# EAGLE board Hy2231 Version (EAGLE 9.4.2)
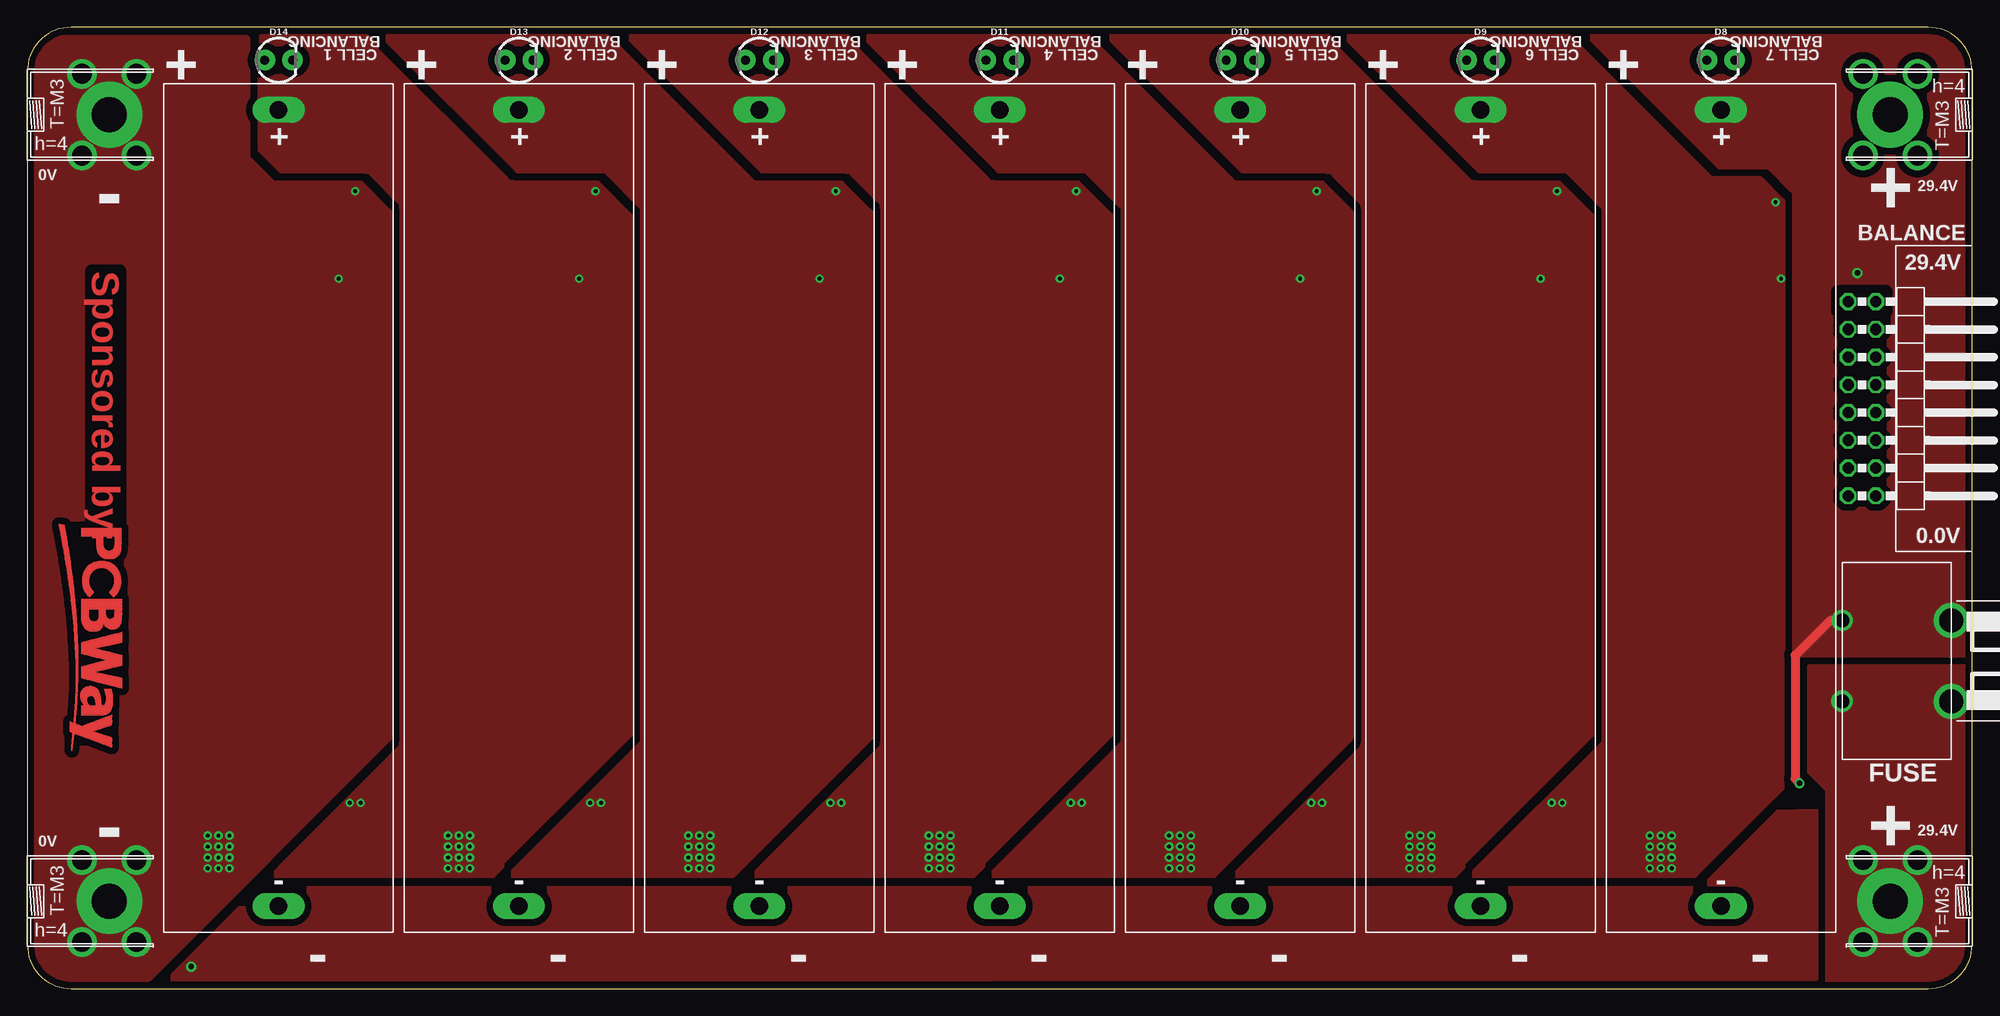
[diagram p0: board, top side]
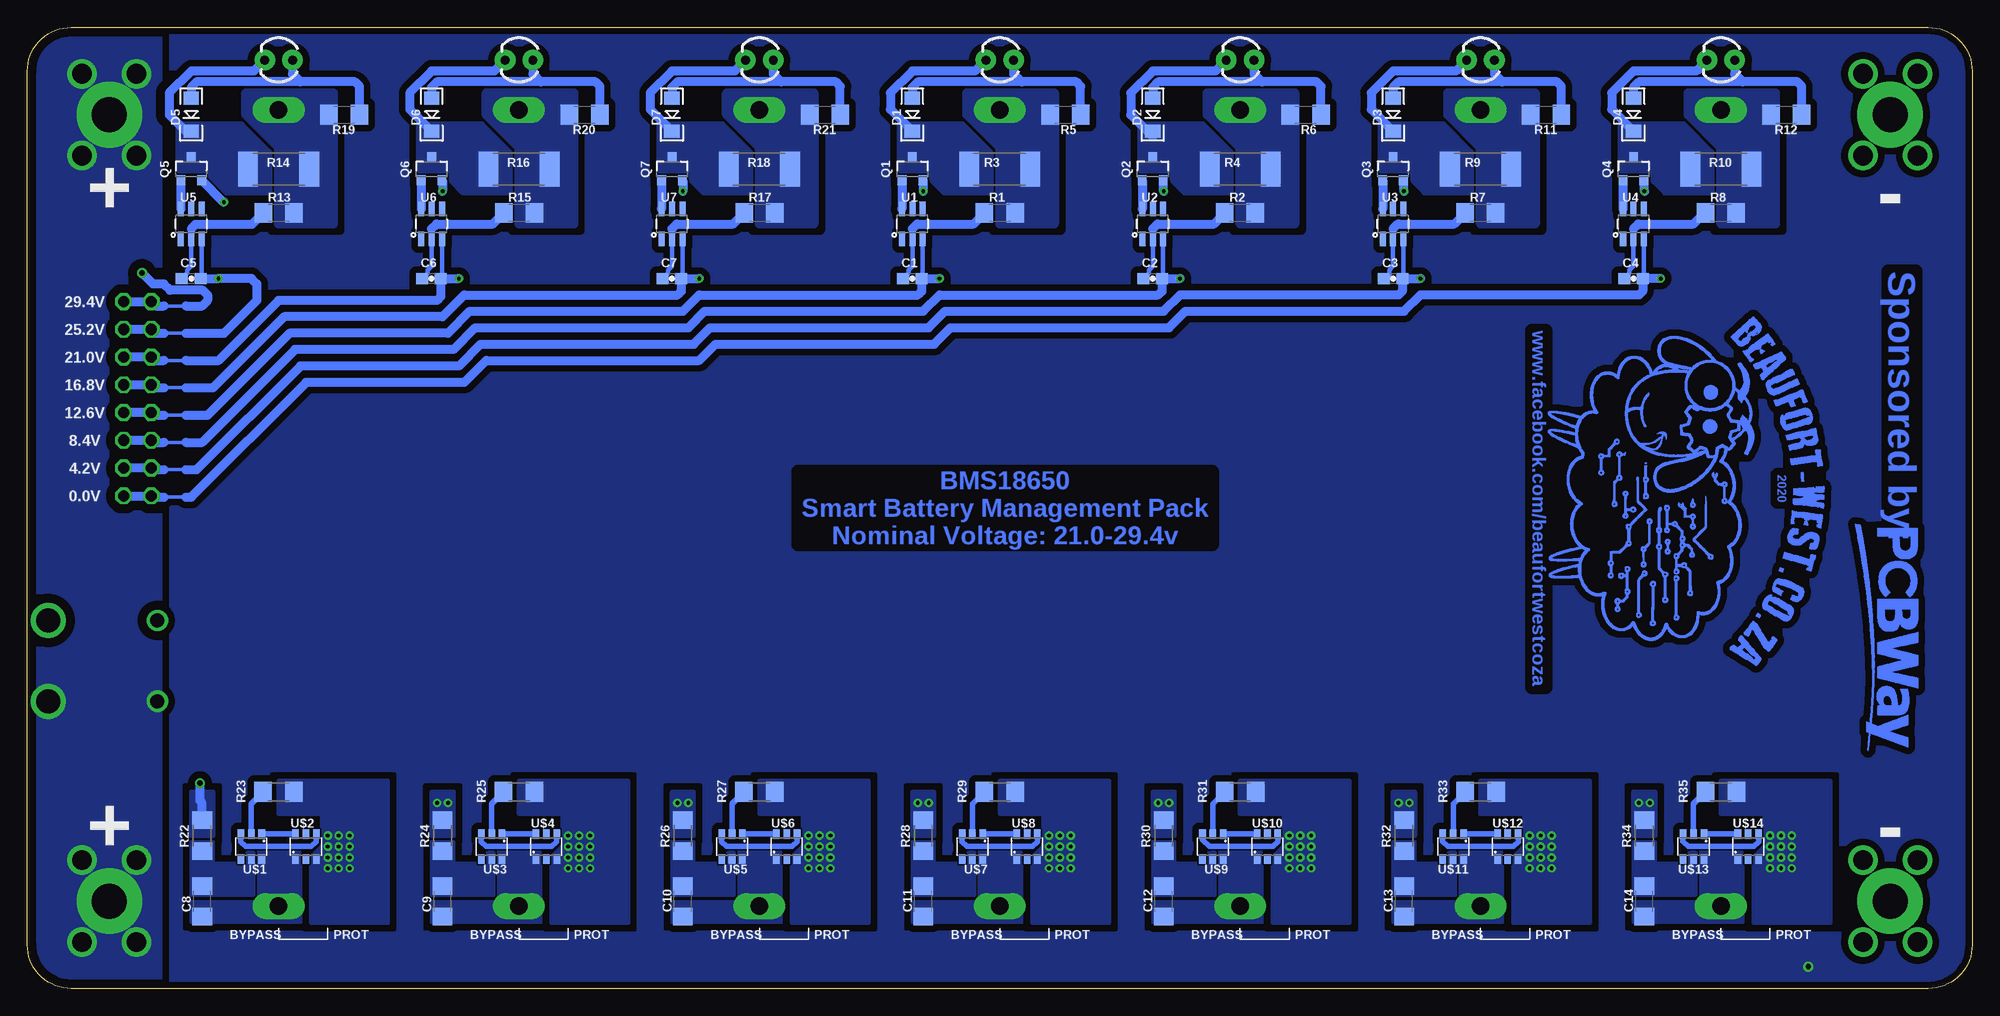
[diagram p1: board, bottom side, seen from below]

Size 178 x 88 mm. Coordinates in mm from the lower left corner, seen from the top.
Outline: 4,0 174,0 arc90 178,4 178,84 arc90 174,88 4,88 arc90 0,84 0,4 arc90 4,0
Copper layers (1*16): Top 0.035mm / dielectric 1.5mm / Bottom 0.035mm
Design rules "default *": minimum track width 6mil, minimum drill 0.35mm, track to track 6mil, track to pad 6mil, pad to pad 6mil, via to via 6mil, smd to smd 6mil, copper to edge 10mil, drill to drill 6mil, minimum pad ring 10mil, minimum via ring 8mil, stop-mask expansion 4mil, vias tented up to drill 0mil, thermal gap 10mil
Net classes: 0 default: width 0.203 mm, clearance 0.152 mm
tRestrict: area 165.7,62 to 170.1,63.8

## Footprints (pad centres in the part's own frame; a part is rotated, then mirrored left to right if it is on the bottom)
0603-CAP = smd 1.1 x 1: 1 -0.85,0; 2 0.85,0
C1206@1 = smd 1.6 x 1.8: 1 -1.4,0; 2 1.4,0
PCB2-M3 = drill 1.8: P$1 -3.75,-5; P$2 3.75,-5; P$3 3.75,-10; P$4 -3.75,-10
LED-1206 = smd 1.2 x 1.4: A -1.5,0; C 1.5,0
LED_3MM = drill 0.813 pad 1.88: A -1.27,0; K 1.27,0
2X08/90 = drill 1.016 octagon: 1 -8.89,-6.35; 2 -8.89,-3.81; 3 -6.35,-6.35; 4 -6.35,-3.81; 5 -3.81,-6.35; 6 -3.81,-3.81; 7 -1.27,-6.35; 8 -1.27,-3.81; 9 1.27,-6.35; 10 1.27,-3.81; 11 3.81,-6.35; 12 3.81,-3.81; 13 6.35,-6.35; 14 6.35,-3.81; 15 8.89,-6.35; 16 8.89,-3.81
SOT23-3 = smd 0.8 x 0.9: 1 -0.95,-1; 2 0.95,-1; 3 0,1.1
1206 = smd 1.6 x 1.8: 1 -1.4,0; 2 1.4,0
R2512 = smd 1.8 x 3.2: 1 -2.8,0; 2 2.8,0
R1206 = smd 1.6 x 1.803: 1 -1.422,0; 2 1.422,0
SOT23-6 = smd 0.55 x 1.35: 1 -0.95,-1.375; 2 0,-1.375; 3 0.95,-1.375; 4 0.95,1.375; 5 0,1.375; 6 -0.95,1.375
SOT23-6' = smd 0.6 x 0.9: 1 -0.95,-1.15; 2 0,-1.15; 3 0.95,-1.15; 4 0.95,1.15; 5 0,1.15; 6 -0.95,1.15
18650PTH-SINGLE = drill 1.6 long: NEG -36.45,0; POS 36.45,0
18MMFUSEHOLDER = drill 1.3: F1.0 -3.7,5; F2.0 3.7,5 | drill 2.2: F1.1 -3.7,-5; F2.1 3.7,-5

## Placement (x,y rotation side)
C1  104  [0603-CAP]  97,65 0 bottom
C2  104  [0603-CAP]  75,65 0 bottom
C3  104  [0603-CAP]  53,65 0 bottom
C4  104  [0603-CAP]  31,65 0 bottom
C5  104  [0603-CAP]  163,65 0 bottom
C6  104  [0603-CAP]  141,65 0 bottom
C7  104  [0603-CAP]  119,65 0 bottom
C8  0.1UF  [C1206@1]  162,8 90 bottom
C9  0.1UF  [C1206@1]  140,8 90 bottom
C10  0.1UF  [C1206@1]  118,8 90 bottom
C11  0.1UF  [C1206@1]  96,8 90 bottom
C12  0.1UF  [C1206@1]  74,8 90 bottom
C13  0.1UF  [C1206@1]  52,8 90 bottom
C14  0.1UF  [C1206@1]  30,8 90 bottom
CON1  PCB-2M3  [PCB2-M3]  0,80 90 top
CON2  PCB-2M3  [PCB2-M3]  178,80 270 top
CON7  PCB-2M3  [PCB2-M3]  0,8 90 top
CON8  PCB-2M3  [PCB2-M3]  178,8 270 top
D1  red  [LED-1206]  97,80 270 bottom
D2  red  [LED-1206]  75,80 270 bottom
D3  red  [LED-1206]  53,80 270 bottom
D4  red  [LED-1206]  31,80 270 bottom
D5  red  [LED-1206]  163,80 270 bottom
D6  red  [LED-1206]  141,80 270 bottom
D7  red  [LED-1206]  119,80 270 bottom
D8  [LED_3MM]  155,85 0 top
D9  [LED_3MM]  133,85 0 top
D10  [LED_3MM]  111,85 0 top
D11  [LED_3MM]  89,85 0 top
D12  [LED_3MM]  67,85 0 top
D13  [LED_3MM]  45,85 0 top
D14  [LED_3MM]  23,85 0 top
JP2  [2X08/90]  173,54 270 top
Q1  2302  [SOT23-3]  97,75 0 bottom
Q2  2302  [SOT23-3]  75,75 0 bottom
Q3  2302  [SOT23-3]  53,75 0 bottom
Q4  2302  [SOT23-3]  31,75 0 bottom
Q5  2302  [SOT23-3]  163,75 0 bottom
Q6  2302  [SOT23-3]  141,75 0 bottom
Q7  2302  [SOT23-3]  119,75 0 bottom
R1  100R  [1206]  89,71 180 bottom
R2  100R  [1206]  67,71 180 bottom
R3  100R  [R2512]  89,75 180 bottom
R4  100R  [R2512]  67,75 180 bottom
R5  10K  [1206]  83,80 0 bottom
R6  10K  [1206]  61,80 0 bottom
R7  100R  [1206]  45,71 180 bottom
R8  100R  [1206]  23,71 180 bottom
R9  100R  [R2512]  45,75 180 bottom
R10  100R  [R2512]  23,75 180 bottom
R11  10K  [1206]  39,80 0 bottom
R12  10K  [1206]  17,80 0 bottom
R13  100R  [1206]  155,71 180 bottom
R14  100R  [R2512]  155,75 180 bottom
R15  100R  [1206]  133,71 180 bottom
R16  100R  [R2512]  133,75 180 bottom
R17  100R  [1206]  111,71 180 bottom
R18  100R  [R2512]  111,75 180 bottom
R19  10K  [1206]  149,80 0 bottom
R20  10K  [1206]  127,80 0 bottom
R21  10K  [1206]  105,80 0 bottom
R22  100  [R1206]  162,14 90 bottom
R23  2K  [R1206]  155,18 180 bottom
R24  100  [R1206]  140,14 90 bottom
R25  2K  [R1206]  133,18 180 bottom
R26  100  [R1206]  118,14 90 bottom
R27  2K  [R1206]  111,18 180 bottom
R28  100  [R1206]  96,14 90 bottom
R29  2K  [R1206]  89,18 180 bottom
R30  100  [R1206]  74,14 90 bottom
R31  2K  [R1206]  67,18 180 bottom
R32  100  [R1206]  52,14 90 bottom
R33  2K  [R1206]  45,18 180 bottom
R34  100  [R1206]  30,14 90 bottom
R35  2K  [R1206]  23,18 180 bottom
U1  HY2213  [SOT23-6]  97,70 0 bottom
U2  HY2213  [SOT23-6]  75,70 0 bottom
U3  HY2213  [SOT23-6]  53,70 0 bottom
U4  HY2213  [SOT23-6]  31,70 0 bottom
U5  HY2213  [SOT23-6]  163,70 0 bottom
U6  HY2213  [SOT23-6]  141,70 0 bottom
U7  HY2213  [SOT23-6]  119,70 0 bottom
U$1  FS312F-G  [SOT23-6']  157.5,13 180 bottom
U$2  FS8205  [SOT23-6']  152.5,13 0 bottom
U$3  FS312F-G  [SOT23-6']  135.5,13 180 bottom
U$4  FS8205  [SOT23-6']  130.5,13 0 bottom
U$5  FS312F-G  [SOT23-6']  113.5,13 180 bottom
U$6  FS8205  [SOT23-6']  108.5,13 0 bottom
U$7  FS312F-G  [SOT23-6']  91.5,13 180 bottom
U$8  FS8205  [SOT23-6']  86.5,13 0 bottom
U$9  FS312F-G  [SOT23-6']  69.5,13 180 bottom
U$10  FS8205  [SOT23-6']  64.5,13 0 bottom
U$11  FS312F-G  [SOT23-6']  47.5,13 180 bottom
U$12  FS8205  [SOT23-6']  42.5,13 0 bottom
U$13  FS312F-G  [SOT23-6']  25.5,13 180 bottom
U$14  FS8205  [SOT23-6']  20.5,13 0 bottom
U$15  18650SINGLE  [18650PTH-SINGLE]  155,44 90 top
U$16  18650SINGLE  [18650PTH-SINGLE]  133,44 90 top
U$17  18650SINGLE  [18650PTH-SINGLE]  111,44 90 top
U$18  18650SINGLE  [18650PTH-SINGLE]  89,44 90 top
U$19  18650SINGLE  [18650PTH-SINGLE]  67,44 90 top
U$20  18650SINGLE  [18650PTH-SINGLE]  45,44 90 top
U$21  18650SINGLE  [18650PTH-SINGLE]  23,44 90 top
U$22  18MMFUSEHOLDER  [18MMFUSEHOLDER]  171.1,30 90 top

## Library data of the parts
C1-C7 D1-D7 R1-R21 = z_jlc_smt
C8-C14 R22-R35 = rcl
CON1 CON2 CON7 CON8 = Screw Terminals
D8-D14 = SparkFun-LED; PROD_ID: DIO-08794
JP2 = pinhead
Q1-Q7 = xmgu2008; PROD_ID: TRAN-12988
U1-U7 = xmgu2008
U$1-U$14 = buckboost
U$15-U$21 = 18650HOLDER
U$22 = Fuse Holder

## Nets
0V: C4.2 CON1.P$1 CON1.P$2 CON1.P$3 CON1.P$4 CON7.P$1 CON7.P$2 CON7.P$3 CON7.P$4 JP2.15 JP2.16 Q4.2 R35.1 U4.3 U$14.3
4.2V: C3.2 JP2.13 JP2.14 Q3.2 R8.1 R10.1 R12.1 R33.1 R34.2 U3.3 U$12.3 U$21.POS
8.4V: C2.2 JP2.11 JP2.12 Q2.2 R7.1 R9.1 R11.1 R31.1 R32.2 U2.3 U$10.3 U$20.POS
12.6V: C1.2 JP2.9 JP2.10 Q1.2 R2.1 R4.1 R6.1 R29.1 R30.2 U1.3 U$8.3 U$19.POS
16.8V: C7.2 JP2.7 JP2.8 Q7.2 R1.1 R3.1 R5.1 R27.1 R28.2 U7.3 U$6.3 U$18.POS
21.0V: C6.2 JP2.5 JP2.6 Q6.2 R17.1 R18.1 R21.1 R25.1 R26.2 U6.3 U$4.3 U$17.POS
25.2V: C5.2 JP2.3 JP2.4 Q5.2 R15.1 R16.1 R20.1 R23.1 R24.2 U5.3 U$2.3 U$16.POS
29.4V: JP2.1 JP2.2 R13.1 R14.1 R19.1 R22.2 U$15.POS U$22.F2.0 U$22.F2.1
N$1: C1.1 R1.2 U1.2
N$2: C5.1 R13.2 U5.2
N$3: Q1.1 U1.6
N$4: D1.C D11.K Q1.3 R3.2
N$5: Q5.1 U5.6
N$6: C2.1 R2.2 U2.2
N$7: Q2.1 U2.6
N$8: D2.C D12.K Q2.3 R4.2
N$9: C3.1 R7.2 U3.2
N$10: Q3.1 U3.6
N$11: D3.C D13.K Q3.3 R9.2
N$12: C4.1 R8.2 U4.2
N$13: Q4.1 U4.6
N$14: D4.C D14.K Q4.3 R10.2
N$15: D5.C D8.K Q5.3 R14.2
N$16: C6.1 R15.2 U6.2
N$17: Q6.1 U6.6
N$18: D6.C D9.K Q6.3 R16.2
N$19: C7.1 R17.2 U7.2
N$20: Q7.1 U7.6
N$21: D7.C D10.K Q7.3 R18.2
N$22: D5.A D8.A R19.2
N$23: D6.A D9.A R20.2
N$24: D7.A D10.A R21.2
N$25: D1.A D11.A R5.2
N$26: R23.2 U$1.2
N$27: D2.A D12.A R6.2
N$28: R25.2 U$3.2
N$29: D3.A D13.A R11.2
N$30: R27.2 U$5.2
N$31: D4.A D14.A R12.2
N$32: R29.2 U$7.2
N$33: R31.2 U$9.2
N$34: R33.2 U$11.2
N$35: R35.2 U$13.2
N$37: CON2.P$1 CON2.P$2 CON2.P$3 CON2.P$4 CON8.P$1 CON8.P$2 CON8.P$3 CON8.P$4 U$22.F1.0 U$22.F1.1
NEG1: C14.1 U$13.6 U$14.1 U$21.NEG
NEG2: C13.1 U$11.6 U$12.1 U$20.NEG
NEG3: C12.1 U$9.6 U$10.1 U$19.NEG
NEG4: C11.1 U$7.6 U$8.1 U$18.NEG
NEG5: C10.1 U$5.6 U$6.1 U$17.NEG
NEG6: C9.1 U$3.6 U$4.1 U$16.NEG
NEG7: C8.1 U$1.6 U$2.1 U$15.NEG
OC: U$1.3 U$2.4
OC1: U$3.3 U$4.4
OC2: U$5.3 U$6.4
OC3: U$7.3 U$8.4
OC4: U$9.3 U$10.4
OC5: U$11.3 U$12.4
OC6: U$13.3 U$14.4
OD: U$1.1 U$2.6
OD1: U$3.1 U$4.6
OD2: U$5.1 U$6.6
OD3: U$7.1 U$8.6
OD4: U$9.1 U$10.6
OD5: U$11.1 U$12.6
OD6: U$13.1 U$14.6
VCC-PROT: C8.2 R22.1 U$1.5
VCC-PROT1: C9.2 R24.1 U$3.5
VCC-PROT2: C10.2 R26.1 U$5.5
VCC-PROT3: C11.2 R28.1 U$7.5
VCC-PROT4: C12.2 R30.1 U$9.5
VCC-PROT5: C13.2 R32.1 U$11.5
VCC-PROT6: C14.2 R34.1 U$13.5

## Tracks (layer width: path | path; a pad name or v marks a point on that pad's centre or on a via)
0V  (via drill 0.35, 3.2 pad 6)
  Bottom 0.305: 165.5,45 163.5,45
  Bottom 0.406: U4.3 30.05,65.1
  Bottom 0.813: 30.05,65.1 C4.2 | Q4.2 30.05,73.05 v30,73 | JP2.16 JP2.15 166.54,45 165.5,45 | C4.2 30.15,63.85 30.5,63.5 50.5,63.5 52,62 72,62 73.5,60.5 93.5,60.5 95,59 115,59 116.5,57.5 136,57.5 138,55.5 152.5,55.5 163,45 163.5,45 | v28.5,65 C4.2
  other vias: 18.5,12 17.5,12 18.5,13 17.5,13 18.5,14 17.5,14 18.5,11 17.5,11 16.5,14 16.5,13 16.5,12 16.5,11 7.5,80 7.5,8
  pour Top (isolate 0.61, no thermals): 1,86.9 20,86.9 20,76 22.4,73.6 30.4,73.6 33,71 33,23 11,1 1,1
  pour Bottom (rank 2, no thermals): 19,13 20,12 20,6 13,6 13,19 23,19 23,16 19,16
4.2V  (via drill 0.35)
  Bottom 0.305: 165.5,47.5 163.5,47.5
  Bottom 0.406: U3.3 52.05,65.1
  Bottom 0.813: 52.05,65.1 C3.2 | Q3.2 52.05,73.05 v52,73 | JP2.14 JP2.13 166.5,47.5 165.5,47.5 | C3.2 52.15,63.85 52.5,63.5 72.5,63.5 74,62 94,62 95.5,60.5 115.5,60.5 117,59 136.5,59 138.5,57 153,57 162.5,47.5 163.5,47.5 | C3.2 v50.5,65
  other vias: 40.5,12 40.5,11 40.5,13 40.5,14 39.5,14 39.5,13 39.5,12 39.5,11 30.5,17 29.5,17 38.5,14 38.5,13 38.5,12 38.5,11
  pour Bottom (no thermals): 18,82 18,70 23,70 23,77 26,80 26,82
  pour Top (isolate 0.61, rank 2, no thermals): 21.5,87 31,87 44.4,73.6 52.4,73.6 55,71 55,23 42.5,10.5 22.5,10.5 34.5,22.5 34.5,71.5 31,75 23,75 21.5,76.5
  pour Bottom (rank 2, no thermals): 41,13 42,12 42,6 35,6 35,19 45,19 45,16 41,16
  pour Bottom (rank 2, no thermals): 29,14 31,14 31,18 29,18
8.4V  (via drill 0.35)
  Bottom 0.305: 165.5,50 163.5,50
  Bottom 0.406: U2.3 74.05,65.1
  Bottom 0.813: 74.05,65.1 C2.2 | Q2.2 74.05,73.05 v74,73 | JP2.12 JP2.11 166.46,50 165.5,50 | C2.2 74.15,63.85 74.5,63.5 94.5,63.5 96,62 116,62 117.5,60.5 137,60.5 139,58.5 153.5,58.5 162,50 163.5,50 | C2.2 v72.5,65
  other vias: 62.5,12 62.5,11 62.5,13 62.5,14 61.5,14 61.5,13 61.5,12 61.5,11 51.5,17 52.5,17 60.5,14 60.5,13 60.5,12 60.5,11
  pour Bottom (no thermals): 40,82 40,70 45,70 45,77 48,80 48,82
  pour Top (isolate 0.61, no thermals): 33,87 53,87 66.4,73.6 74.4,73.6 77,71 77,23 64.5,10.5 44.5,10.5 56.5,22.5 56.5,71.5 53,75 45,75
  pour Bottom (rank 2, no thermals): 63,13 64,12 64,6 57,6 57,19 67,19 67,16 63,16
  pour Bottom (rank 2, no thermals): 51,14 53,14 53,18 51,18
12.6V  (via drill 0.35)
  Bottom 0.305: 165.5,52.5 163.5,52.5
  Bottom 0.406: U1.3 96.05,65.1
  Bottom 0.813: 96.05,65.1 C1.2 | Q1.2 96,73.95 v96,73 | JP2.10 JP2.9 166.42,52.5 165.5,52.5 | C1.2 96.15,63.85 96.5,63.5 116.5,63.5 118,62 137.5,62 139.5,60 154,60 161.5,52.5 163.5,52.5 | C1.2 v94.5,65
  other vias: 84.5,12 84.5,13 84.5,14 84.5,11 83.5,11 83.5,12 83.5,13 83.5,14 74.5,17 73.5,17 82.5,14 82.5,12 82.5,11 82.5,13
  pour Top (isolate 0.61, rank 2, no thermals): 55,87 75,87 88.4,73.6 96.4,73.6 99,71 99,23 86.5,10.5 66.5,10.5 78.5,22.5 78.5,71.5 75,75 67,75
  pour Bottom (no thermals): 62,82 62,70 67,70 67,77 70,80 70,82
  pour Bottom (rank 2, no thermals): 85,13 86,12 86,6 79,6 79,19 89,19 89,16 85,16
  pour Bottom (rank 2, no thermals): 73,14 75,14 75,18 73,18
16.8V  (via drill 0.35)
  Bottom 0.305: 165.5,55 163.5,55
  Bottom 0.406: U7.3 118.05,65.1
  Bottom 0.813: 118.05,65.1 C7.2 | Q7.2 118,73.95 v118,73 | JP2.8 JP2.7 166.38,55 165.5,55 | C7.2 118.15,63.85 118.5,63.5 138,63.5 140,61.5 154.5,61.5 161,55 163.5,55 | C7.2 v116.5,65
  other vias: 106.5,12 106.5,11 106.5,13 106.5,14 105.5,14 105.5,13 105.5,12 105.5,11 96.5,17 95.5,17 104.5,14 104.5,13 104.5,12 104.5,11
  pour Top (isolate 0.61, no thermals): 77,87 97,87 110.4,73.6 118.4,73.6 121,71 121,23 108.5,10.5 88.5,10.5 100.5,22.5 100.5,71.5 97,75 89,75
  pour Bottom (no thermals): 84,82 84,70 89,70 89,77 92,80 92,82
  pour Bottom (rank 2, no thermals): 107,13 108,12 108,6 101,6 101,19 111,19 111,16 107,16
  pour Bottom (rank 2, no thermals): 95,14 97,14 97,18 95,18
21.0V  (via drill 0.35)
  Bottom 0.305: 165.5,57.5 163.5,57.5
  Bottom 0.406: U6.3 140.05,65.1
  Bottom 0.813: 140.05,65.1 C6.2 | Q6.2 140,73.95 v140,73 | JP2.6 JP2.5 166.34,57.5 165.5,57.5 | C6.2 140.15,63.35 140.5,63 155,63 160.5,57.5 163.5,57.5 | C6.2 v138.5,65
  other vias: 128.5,12 128.5,13 128.5,14 128.5,11 127.5,11 127.5,12 127.5,13 127.5,14 117.5,17 118.5,17 126.5,14 126.5,13 126.5,12 126.5,11
  pour Top (isolate 0.61, rank 2, no thermals): 99,87 119,87 132.4,73.6 140.4,73.6 143,71 143,23 130.5,10.5 110.5,10.5 122.5,22.5 122.5,71.5 119,75 111,75
  pour Bottom (no thermals): 106,82 106,70 111,70 111,77 114,80 114,82
  pour Bottom (rank 2, no thermals): 129,13 130,12 130,6 123,6 123,19 133,19 133,16 129,16
  pour Bottom (rank 2, no thermals): 117,14 119,14 119,18 117,18
25.2V  (via drill 0.35)
  Bottom 0.305: 165.5,60 163.5,60
  Bottom 0.406: U5.3 162.05,65.1
  Bottom 0.813: 162.05,65.1 C5.2 v160.5,65 157.5,65 157,64.5 157,63 160,60 163.5,60 | Q5.2 160.05,72 v160,72 | JP2.4 JP2.3 166.3,60 165.5,60
  other vias: 150.5,12 150.5,11 150.5,13 150.5,14 149.5,14 149.5,13 149.5,12 149.5,11 139.5,17 140.5,17 148.5,14 148.5,13 148.5,12 148.5,11
  pour Top (isolate 0.61, no thermals): 121,87 141,87 154,74 158.5,74 160.5,72 160.5,18.5 152.5,10.5 132.5,10.5 144.5,22.5 144.5,71.5 141,75 133,75
  pour Bottom (no thermals): 128,82 128,70 133,70 133,77 136,80 136,82
  pour Bottom (rank 2, no thermals): 151,13 152,12 152,6 145,6 145,19 155,19 155,16 151,16
  pour Bottom (rank 2, no thermals): 139,14 141,14 141,18 139,18
29.4V  (via drill 0.5)
  Top 0.813: U$22.F2.0 165,33.7 161.8,30.5 161.8,19.2 v162.2,18.8
  Bottom 0.305: 165.5,62.5 163.5,62.5
  Bottom 0.813: R22.2 162,17 162.2,17.2 v162.2,18.8 | JP2.2 JP2.1 166.26,62.5 165.5,62.5 | v167.5,65.5 166.5,64.5 165.5,64.5 164.94,63.94 161.94,63.94 161.5,63.5 161.5,63 162,62.5 163.5,62.5
  pour Bottom (no thermals): 150,82 150,70 155,70 155,77 158,80 158,82
  pour Bottom (rank 2, no thermals): 161,14 163,14 163,18 161,18
  pour Top (isolate 0.61, rank 2, no thermals): 143,87 177.5,87 177.5,30.7 161.9,30.7 161.9,64.5 161.8,64.5 161.8,72.4 159.2,75 155,75
COSMETICPLANE  (via drill 0.5)
  other vias: 15,2
  pour Top (isolate 0.61, rank 6): 13,1 21,9 153,9 160,16 163.6,16.1 163.6,1.1
  pour Bottom (isolate 0.61, rank 6): 178,88 3.5,88 0,84.5 0,3.5 3.5,0 178,0
N$1
  Bottom 0.406: C1.1 97.36,65.49 97.36,65.77 97,66.13 U1.2 97,69.56
  Bottom 0.813: 97,69.56 96.56,70 91.4,70 R1.2
N$2
  Bottom 0.406: C5.1 163.36,65.49 163.36,65.77 163,66.13 U5.2 163,69.56
  Bottom 0.813: 163,69.56 162.6,69.96 157.44,69.96 R13.2
N$3
  Bottom 0.813: Q1.1 U1.6
N$4
  Bottom 0.813: D11.K 91.27,84 97,84 99,82 99,80.5 D1.C
  pour Bottom (rank 2, no thermals): 90,76.5 90,73 94,73 95,74 95,75 98,75 98,79 92.5,79
N$5
  Bottom 0.813: Q5.1 U5.6
N$6
  Bottom 0.406: C2.1 75.36,65.49 75.36,65.77 75,66.13 U2.2 75,69.56
  Bottom 0.813: 75,69.56 74.56,70 69.4,70 R2.2
N$7
  Bottom 0.813: Q2.1 U2.6
N$8
  Bottom 0.813: D12.K 69.27,84 75,84 77,82 77,80 75,78
  pour Bottom (rank 2, no thermals): 68,76.5 68,73 72,73 73,74 73,75 76,75 76,79 70.5,79
N$9
  Bottom 0.406: C3.1 53.5,65 53.36,65.14 53.36,65.77 53,66.13 U3.2 53,69.56
  Bottom 0.813: 53,69.56 52.6,69.96 52.54,69.96 52.5,70 47.4,70 R7.2
N$10
  Bottom 0.813: Q3.1 U3.6
N$11
  Bottom 0.813: D13.K 47.27,84 53,84 55,82 55,80.5 D3.C
  pour Bottom (rank 2, no thermals): 46,76.5 46,73 50,73 51,74 51,75 54,75 54,79 48.5,79
N$12
  Bottom 0.406: C4.1 31.36,65.49 31.36,65.77 31,66.13 U4.2 31,69.56
  Bottom 0.813: 31,69.56 30.56,70 25.5,70 24.5,71 R8.2
N$13
  Bottom 0.813: Q4.1 U4.6
N$14
  Bottom 0.813: D14.K 25.27,84 31,84 33,82 33,80.5 D4.C
  pour Bottom (rank 2, no thermals): 24,76.5 24,73 28,73 29,74 29,75 32,75 32,79 26.5,79
N$15
  Bottom 0.813: D8.K 157.27,84 163,84 165,82 165,80 163.5,78.5 D5.C
  pour Bottom (rank 2, no thermals): 156,76.5 156,73 160,73 161,74 161,75 164,75 164,79 158.5,79
N$16
  Bottom 0.406: C6.1 141.36,65.49 141.36,65.77 141,66.13 U6.2 141,69.56
  Bottom 0.813: 141,69.56 140.56,70 135.4,70 R15.2
N$17
  Bottom 0.813: Q6.1 U6.6
N$18
  Bottom 0.813: D9.K 135.27,84 141,84 143,82 143,80.5 D6.C
  pour Bottom (rank 2, no thermals): 134,76.5 134,73 138,73 139,74 139,75 142,75 142,79 136.5,79
N$19
  Bottom 0.406: C7.1 119.36,65.49 119.36,65.77 119,66.13 U7.2 119,69.56
  Bottom 0.813: 119,69.56 118.56,70 113.4,70 R17.2
N$20
  Bottom 0.813: Q7.1 U7.6
N$21
  Bottom 0.813: D10.K 113.27,84 119,84 121,82 121,80.5 D7.C
  pour Bottom (rank 2, no thermals): 112,76.5 112,73 116,73 117,74 117,75 120,75 120,79 114.5,79
N$22
  Bottom 0.813: R19.2 147.6,82.6 148,83 153,83 | 153,83 162.5,83 163,82.5 D5.A | D8.A 153.73,83.73 153,83
N$23
  Bottom 0.813: R20.2 125.6,82.6 126,83 131,83 | D6.A 141,82.5 140.5,83 131,83 | D9.A 131.73,83.73 131,83
N$24
  Bottom 0.813: R21.2 103.6,82.6 104,83 109,83 | D7.A 119,82.5 118.5,83 109,83 | D10.A 109.73,83.73 109,83
N$25
  Bottom 0.813: R5.2 81.6,82.6 82,83 87,83 | D1.A 97,82.5 96.5,83 87,83 | D11.A 87.73,83.73 87,83
N$26
  Bottom 0.508: U$1.2 157.5,16.92 R23.2
N$27
  Bottom 0.813: R6.2 59.6,82.6 60,83 65,83 | 65,83 74.5,83 75,82.5 D2.A | D12.A 65.73,83.73 65,83
N$28
  Bottom 0.508: U$3.2 135.5,16.92 R25.2
N$29
  Bottom 0.813: R11.2 37.6,82.6 38,83 43,83 | 43,83 52.5,83 53,82.5 D3.A | D13.A 43.73,83.73 43,83
N$30
  Bottom 0.508: U$5.2 113.5,16.92 R27.2
N$31
  Bottom 0.813: R12.2 15.6,82.6 16,83 21,83 | D4.A 31,82.5 30.5,83 21,83 | D14.A 21.73,83.73 21,83
N$32
  Bottom 0.508: U$7.2 91.5,16.92 R29.2
N$33
  Bottom 0.508: U$9.2 69.5,16.92 R31.2
N$34
  Bottom 0.508: U$11.2 47.5,16.92 R33.2
N$35
  Bottom 0.508: U$13.2 25.5,16.92 R35.2
N$37  (via drill 3.2 pad 6)
  other vias: 170.5,80 170.5,8
  pour Bottom (isolate 0.813, rank 3, no thermals): 166,0.5 166,87 177.5,87 177.5,0.5
  pour Top (isolate 0.61, rank 3, no thermals): 177.5,29.5 163.4,29.5 163.1,29.2 163.1,20.1 164.9,18.3 164.9,0.5 177.5,0.5
NEG1
  pour Bottom (rank 2, no thermals): 21,12.5 21,6 31,6 31,8 25,8 25,12.5
NEG2
  pour Bottom (rank 2, no thermals): 43,12.5 43,6 53,6 53,8 47,8 47,12.5
NEG3
  pour Bottom (rank 2, no thermals): 65,12.5 65,6 75,6 75,8 69,8 69,12.5
NEG4
  pour Bottom (rank 2, no thermals): 87,12.5 87,6 97,6 97,8 91,8 91,12.5
NEG5
  pour Bottom (rank 2, no thermals): 109,12.5 109,6 119,6 119,8 113,8 113,12.5
NEG6
  pour Bottom (rank 2, no thermals): 131,12.5 131,6 141,6 141,8 135,8 135,12.5
NEG7
  pour Bottom (rank 2, no thermals): 153,12.5 153,6 163,6 163,8 157,8 157,12.5
OC
  Bottom 0.508: U$2.4 151.55,13.45 152,13 158,13 158.45,13.45 U$1.3
OC1
  Bottom 0.508: U$4.4 129.55,13.45 130,13 136,13 136.45,13.45 U$3.3
OC2
  Bottom 0.508: U$6.4 107.55,13.45 108,13 114,13 114.45,13.45 U$5.3
OC3
  Bottom 0.508: U$8.4 85.55,13.45 86,13 92,13 92.45,13.45 U$7.3
OC4
  Bottom 0.508: U$10.4 63.55,13.45 64,13 69.82,13 70.45,13.63 U$9.3
OC5
  Bottom 0.508: U$12.4 41.55,13.45 42,13 48,13 48.5,13.5 48.5,14.1 U$11.3
OC6
  Bottom 0.508: U$14.4 19.55,13.45 20,13 26,13 26.5,13.5 26.5,14.1 U$13.3
OD
  Bottom 0.508: U$2.6 U$1.1
OD1
  Bottom 0.508: U$4.6 U$3.1
OD2
  Bottom 0.508: U$6.6 U$5.1
OD3
  Bottom 0.508: U$8.6 U$7.1
OD4
  Bottom 0.508: U$10.6 U$9.1
OD5
  Bottom 0.508: U$12.6 U$11.1
OD6
  Bottom 0.508: U$14.6 U$13.1
VCC-PROT
  pour Bottom (no thermals): 157.3,12.5 157.3,8.5 163,8.5 163,13.5 161,13.5 161,11.5 158,11.5 158,12.5
VCC-PROT1
  pour Bottom (no thermals): 135.3,12.5 135.3,8.5 141,8.5 141,13.5 139,13.5 139,11.5 136,11.5 136,12.5
VCC-PROT2
  pour Bottom (no thermals): 113.3,12.5 113.3,8.5 119,8.5 119,13.5 117,13.5 117,11.5 114,11.5 114,12.5
VCC-PROT3
  pour Bottom (no thermals): 91.3,12.5 91.3,8.5 97,8.5 97,13.5 95,13.5 95,11.5 92,11.5 92,12.5
VCC-PROT4
  pour Bottom (no thermals): 69.3,12.5 69.3,8.5 75,8.5 75,13.5 73,13.5 73,11.5 70,11.5 70,12.5
VCC-PROT5
  pour Bottom (no thermals): 47.3,12.5 47.3,8.5 53,8.5 53,13.5 51,13.5 51,11.5 48,11.5 48,12.5
VCC-PROT6
  pour Bottom (no thermals): 25.3,12.5 25.3,8.5 31,8.5 31,13.5 29,13.5 29,11.5 26,11.5 26,12.5
(copper drawn outside any net)
  shapes: Bottom area x7852, Top area x2318

## Text on the board
Top: Sponsored by:
Bottom: Sponsored by: | www.facebook.com/beaufortwestcoza | 2020 | BMS18650 / Smart Battery Management Pack / Nominal Voltage: 21.0-29.4v
tPlace: BALANCING | BALANCING | BALANCING | BALANCING | BALANCING | BALANCING | BALANCING | CELL 1 | CELL 2 | CELL 3 | CELL 4 | CELL 5 | CELL 6 | CELL 7 | + | + | + | + | + | + | + | 0V | + | - | 29.4V | BALANCE | 29.4V | 0.0V | FUSE | - | + | 29.4V | 0V | - | - | - | - | - | - | -
bPlace: + | - | 29.4V | 25.2V | 21.0V | 16.8V | 12.6V | 8.4V | 4.2V | 0.0V | - | + | PROT | BYPASS | PROT | BYPASS | PROT | BYPASS | PROT | BYPASS | PROT | BYPASS | PROT | BYPASS | PROT | BYPASS
tStop: Sponsored by:
bStop: Sponsored by: | www.facebook.com/beaufortwestcoza | 2020 | BMS18650 / Smart Battery Management Pack / Nominal Voltage: 21.0-29.4v